# EAGLE board picoAvaR2 (EAGLE 6.2)
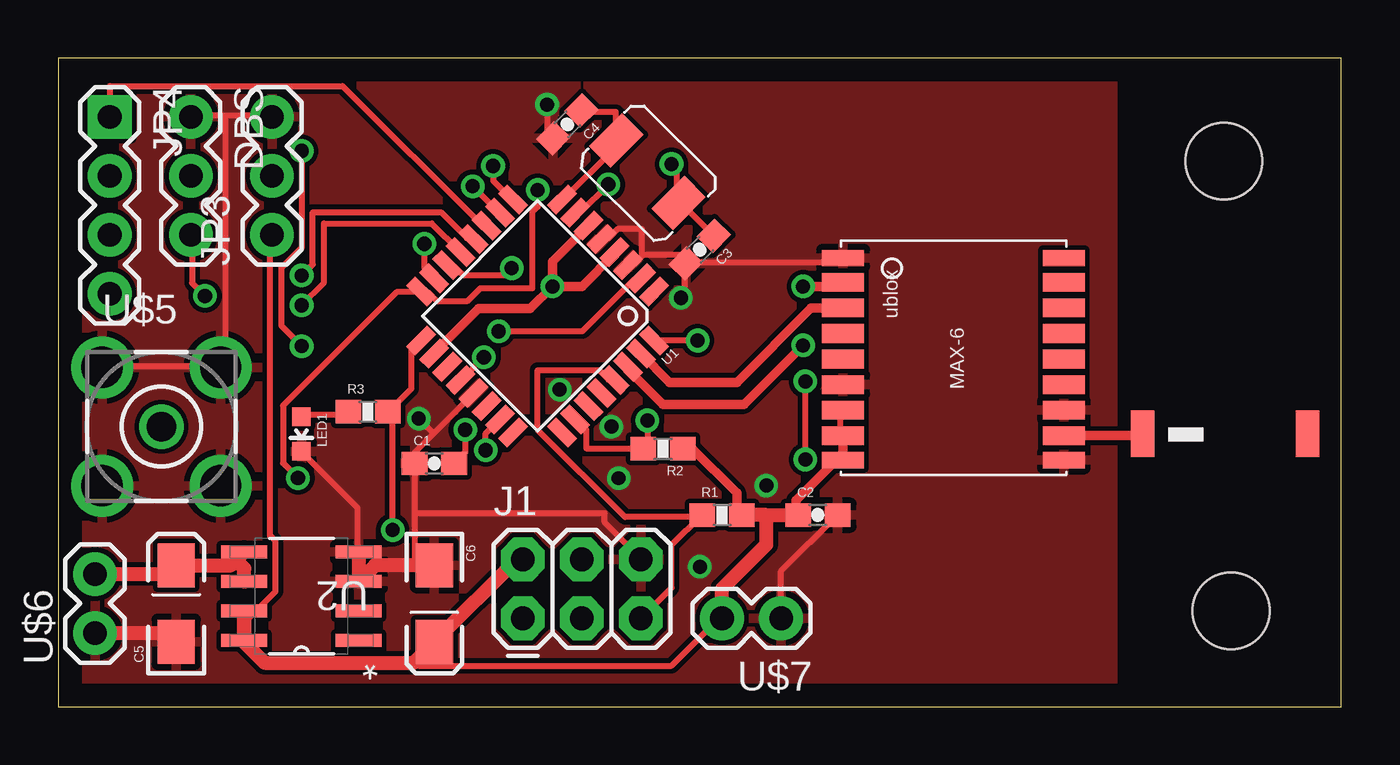
[diagram p0: board, top side]
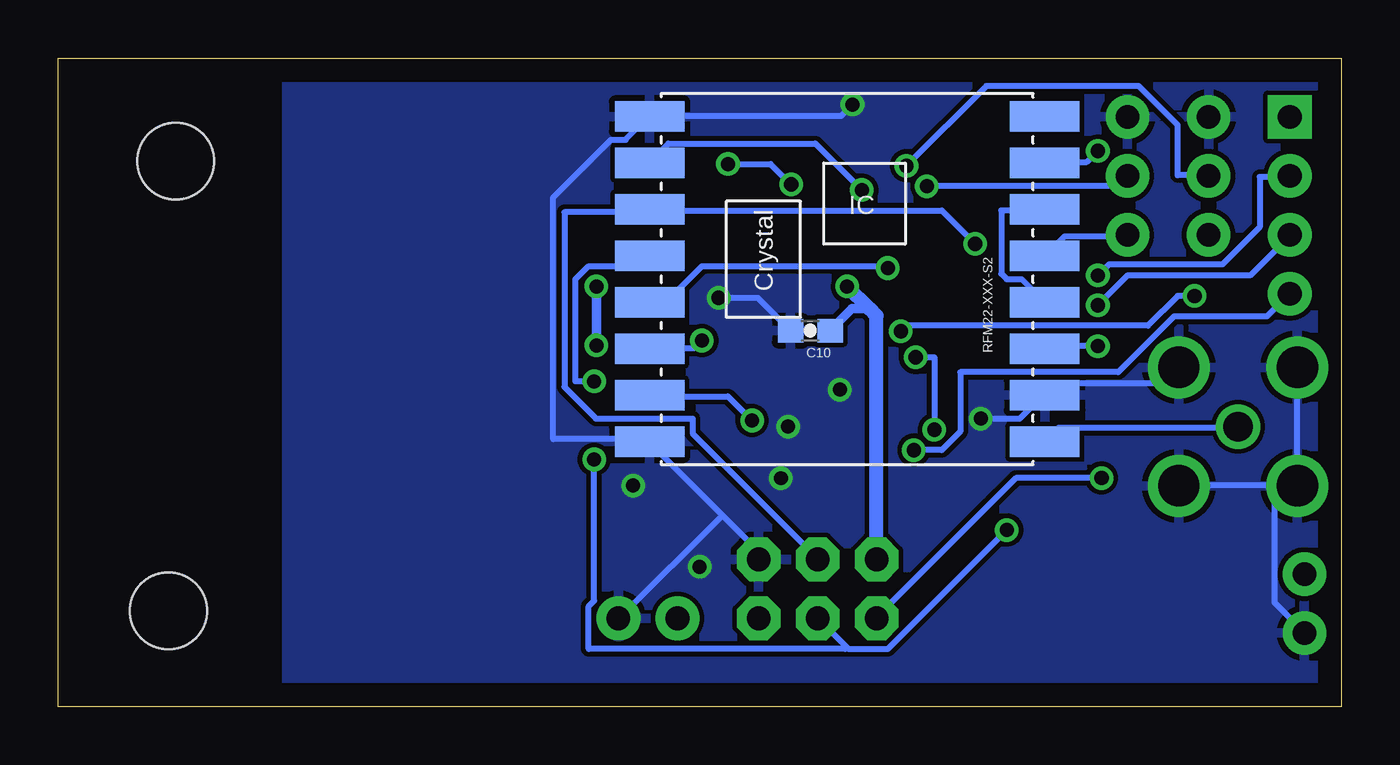
[diagram p1: board, bottom side, seen from below]

Size 55.23 x 27.93 mm. Coordinates in mm from the lower left corner, seen from the top.
Outline: 0,0 55.23,0 55.23,27.93 0,27.93 0,0
Copper layers (1*16): Top 0.035mm / dielectric 1.5mm / Bottom 0.035mm
Design rules: minimum track width 10mil, minimum drill 24mil, track to track 8mil, track to pad 8mil, pad to pad 8mil, via to via 8mil, smd to smd 8mil, copper to edge 40mil, drill to drill 8mil, minimum pad ring 10mil, minimum via ring 8mil, stop-mask expansion 4mil, vias tented up to drill 0mil, thermal gap 10mil
Net classes: 0 default: width 0.203 mm; 1 vcc: width 0.254 mm

## Footprints (pad centres in the part's own frame; a part is rotated, then mirrored left to right if it is on the bottom)
0603-CAP = smd 1.1 x 1: 1 -0.85,0; 2 0.85,0
EIA3216-KIT = smd 1.9 x 1.6: A 1.65,0; C -1.65,0
1X03 = drill 1.016 pad 1.88: 1 0,0; 2 2.54,0; 3 5.08,0
2X3 = drill 1.016 pad 1.88 octagon: 1 0,0; 2 0,2.54; 3 2.54,0; 4 2.54,2.54; 5 5.08,0; 6 5.08,2.54
STAND-OFF = hole 3.302: 0,0
1X04 = drill 1.016 pad 1.88 square: 1 0,0 | drill 1.016 pad 1.88: 2 2.54,0; 3 5.08,0; 4 7.62,0
LED-0603 = smd 0.8 x 0.8: A 0,-0.75; C 0,0.75
0603-RES = smd 1.1 x 1: 1 -0.85,0; 2 0.85,0
RFM22-XXX-S2 = smd 3 x 1.3: 1 -8.5,7; 2 -8.5,5; 3 -8.5,3; 4 -8.5,1; 5 -8.5,-1; 6 -8.5,-3; 7 -8.5,-5; 8 -8.5,-7; 9 8.5,-7; 10 8.5,-5; 11 8.5,-3; 12 8.5,-1; 13 8.5,1; 14 8.5,3; 15 8.5,5; 16 8.5,7
TQFP32-08 = smd 1.27 x 0.559: 1 -4.293,2.8; 2 -4.293,2; 3 -4.293,1.2; 4 -4.293,0.4; 5 -4.293,-0.4; 6 -4.293,-1.2; 7 -4.293,-2; 8 -4.293,-2.8; 17 4.293,-2.8; 18 4.293,-2; 19 4.293,-1.2; 20 4.293,-0.4; 21 4.293,0.4; 22 4.293,1.2; 23 4.293,2; 24 4.293,2.8 | smd 0.559 x 1.27: 9 -2.8,-4.293; 10 -2,-4.293; 11 -1.2,-4.293; 12 -0.4,-4.293; 13 0.4,-4.293; 14 1.2,-4.293; 15 2,-4.293; 16 2.8,-4.293; 25 2.8,4.293; 26 2,4.293; 27 1.2,4.293; 28 0.4,4.293; 29 -0.4,4.293; 30 -1.2,4.293; 31 -2,4.293; 32 -2.8,4.293
SOIC127P600X175-8N = smd 1.981 x 0.559: 1 -2.464,1.905; 2 -2.464,0.635; 3 -2.464,-0.635; 4 -2.464,-1.905; 5 2.464,-1.905; 6 2.464,-0.635; 7 2.464,0.635; 8 2.464,1.905
UBLOX_MAX-6 = smd 1.8 x 0.7: 1_GND 4.95,-4.4; 9_V_RESET 4.95,4.3; 10_GND -4.55,4.3; 18_RESERVED -4.55,-4.4 | smd 1.8 x 0.8: 2_TXD1 4.95,-3.35; 3_RXD1 4.95,-2.25; 4_TIMEPULSE 4.95,-1.15; 5_EXTINT0 4.95,-0.05; 6_V_BCKP 4.95,1.05; 7_VCC_IO 4.95,2.15; 8_VCC 4.95,3.25; 11_RF_IN -4.55,3.25; 12_GND -4.55,2.15; 13_ANTON -4.55,1.05; 14_VCC_RF -4.55,-0.05; 15_RESERVED -4.55,-1.15; 16_SDA2 -4.55,-2.25; 17_SCL2 -4.55,-3.35
ABRACON_ABM3_CRYSTAL = smd 1.3 x 2: P$1 -3.4,0.1; P$2 0.4,0.1
JTI_ANTENNA-1575AT43A40 = smd 1 x 2: FEED -3.81,-1.27; NC 3.29,-1.27
BUS-SMA = drill 1.27: 1 0,0 | drill 1.778: 2 -2.55,2.55; 3 2.55,2.55; 4 2.55,-2.55; 5 -2.55,-2.55
1X02 = drill 1.016 pad 1.88: 1 0,0; 2 2.54,0

## Placement (x,y rotation side)
C1  0.1uF  [0603-CAP]  16.19,10.48 0 top
C2  0.1uF  [0603-CAP]  32.7,8.26 0 top
C3  18pF  [0603-CAP]  27.62,19.68 225 top
C4  18pF  [0603-CAP]  21.91,25.08 225 top
C5  0.1uF  [EIA3216-KIT]  5.08,4.45 90 top
C6  4.7uF  [EIA3216-KIT]  16.19,4.45 270 top
C10  0.1uF  [0603-CAP]  22.86,16.19 180 bottom
DBS  [1X03]  5.71,25.4 270 top
J1  AVR_SPI_PRG_6PTH  [2X3]  20,3.81 0 top
JP1  STAND-OFF  [STAND-OFF]  50.48,4.13 0 top
JP2  STAND-OFF  [STAND-OFF]  50.16,23.49 0 top
JP3  [1X03]  9.21,20.32 90 top
JP4  [1X04]  2.22,25.4 270 top
LED1  [LED-0603]  10.48,11.75 180 top
R1  10k  [0603-RES]  28.57,8.26 0 top
R2  10k  [0603-RES]  26.04,11.11 180 top
R3  [0603-RES]  13.33,12.7 0 top
RFM22-XXX-S2  RFM22  [RFM22-XXX-S2]  21.27,18.41 180 bottom
U1  ATMEGA328  [TQFP32-08]  20.64,16.83 225 top
U2  TPS76633D  [SOIC127P600X175-8N]  10.48,4.76 180 top
U$1  UBLOX_MAX-6  [UBLOX_MAX-6]  38.73,14.92 180 top
U$2  ABRACON_ABM3_CRYSTAL  [ABRACON_ABM3_CRYSTAL]  26.35,21.91 315 top
U$3  JTI_ANTENNA-1575AT43A40  [JTI_ANTENNA-1575AT43A40]  50.48,13.02 0 top
U$5  BUS-SMA  [BUS-SMA]  4.45,12.07 0 top
U$6  [1X02]  1.59,3.17 90 top
U$7  [1X02]  31.12,3.81 180 top

## Library data of the parts
C1-C6 C10 DBS J1 JP1-JP4 LED1 R1-R3 RFM22-XXX-S2 U1 U$6 U$7 = SparkFun
U2 = ava; DESCRIPTION: ULTRALOW QUIESCENT CURRENT 250-mA LOW DROPOUT VOLTAGE REGULATORS; MPN: TPS76633D; OC_FARNELL: 8461422; OC_NEWARK: 77C1060; PACKAGE: SOIC-8; SUPPLIER: Texas Instruments
U$1-U$3 U$5 = ava

## Nets
AREF: C1.2 U1.20
GND [vcc]: C1.1 C2.2 C3.2 C4.2 C5.C C6.C C10.2 DBS.1 J1.6 JP3.3 LED1.C RFM22-XXX-S2.2 RFM22-XXX-S2.9 RFM22-XXX-S2.16 U1.3 U1.5 U1.21 U2.3 U2.4 U$1.1_GND U$1.6_V_BCKP U$1.10_GND U$1.12_GND U$5.2 U$5.3 U$5.4 U$5.5 U$6.1 U$7.1
MISO: J1.1 RFM22-XXX-S2.10 U1.16
MOSI: J1.4 RFM22-XXX-S2.11 U1.15
N$2: LED1.A R3.1
N$3: RFM22-XXX-S2.1 U$5.1
N$4: U$1.11_RF_IN U$3.FEED
N$5: RFM22-XXX-S2.3 RFM22-XXX-S2.7
N$6: RFM22-XXX-S2.4 RFM22-XXX-S2.6
N$9: C3.1 U1.7 U$2.P$2
N$10: C4.1 U1.8 U$2.P$1
NSS_RX: DBS.2 U1.9
NSS_TX: DBS.3 U1.2
PB0: JP4.2 U1.12
PB1: JP4.3 U1.13
PC0: JP4.4 U1.23
PD6: JP3.2 U1.10
PD7: JP4.1 U1.11
RESET: J1.5 R1.1 U1.29
RFM22_NIRQ: RFM22-XXX-S2.14 U1.32
RFM22_NSEL: RFM22-XXX-S2.13 U1.14
RFM22_SDN: R2.2 RFM22-XXX-S2.15 U1.26
SCK: J1.3 R3.2 RFM22-XXX-S2.12 U1.17
UBLOX_RXD: U1.31 U$1.3_RXD1
UBLOX_TXD: U1.30 U$1.2_TXD1
VBATT [vcc]: C5.A U2.5 U2.6 U$6.2
VCC: C2.1 C6.A C10.1 J1.2 JP3.1 R1.2 R2.1 RFM22-XXX-S2.5 U1.4 U1.6 U1.18 U2.7 U2.8 U$1.7_VCC_IO U$1.8_VCC U$1.9_V_RESET U$7.2

## Tracks (layer width: path | path; a pad name or v marks a point on that pad's centre or on a via)
AREF  (via drill 0.61)
  Top 0.254: v17.52,11.93 17.52,10.97 C1.2 | v18.32,15.05 17.36,14.09 U1.20
  Bottom 0.254: v17.52,11.93 17.52,15.05 v18.32,15.05
GND  (via drill 0.6, 0.61)
  Top 0.254: v26.8,17.61 26.96,17.77 26.96,19.05 C3.2 | 25.2,19.45 24.8,19.05 24.56,19.05 U1.3 | 25.2,19.45 26.88,19.45 26.88,19.13 C3.2 | U1.5 23.44,20.17 23.68,20.17 24.08,20.57 25.12,20.57 25.12,19.53 25.2,19.45 | 44,12.73 43.36,12.73 U$1.12_GND | 43.36,10.65 U$1.10_GND | C2.2 33.52,8.25 31.12,5.85 31.12,3.85 U$7.1 | C3.2 27.12,19.13 33.68,19.13 33.68,19.29 U$1.1_GND | 7.2,25.45 9.2,25.45 JP3.3 | 7.2,25.45 5.76,25.45 DBS.1 | 7.2,25.45 7.2,14.81 7.04,14.65 U$5.3 6.88,14.65 1.92,14.65 U$5.2 | LED1.C 10.48,10.97 12.88,8.57 12.88,6.97 U2.4 | 15.36,6.09 15.36,8.33 | 15.36,8.33 15.36,10.41 C1.1 15.36,10.57 15.36,10.97 16.16,11.77 | 16.16,11.77 17.84,13.45 U1.21 | v21.04,25.93 21.04,24.73 21.28,24.49 C4.2 | 15.36,8.33 23.52,8.33 23.52,7.93 25.04,6.41 J1.6 | 16.16,11.77 v15.52,12.41
  Top 0.61: U$6.1 4.7,3.17 C5.C | C6.C 15.36,6.09 13.64,6.09 U2.3 U2.4
  Bottom 0.254: v26.8,17.61 25.12,17.61 23.76,16.25 C10.2 | U$6.1 1.6,3.21 2.88,4.49 2.88,9.45 1.92,9.45 U$5.5 | U$5.4 6.96,9.53 2.96,9.53 U$5.5 | U$5.3 7.04,14.57 7.68,13.93 12.24,13.93 12.72,13.45 RFM22-XXX-S2.2 12.88,13.37 13.84,12.41 v15.52,12.41 | U$5.5 1.92,9.61 1.92,14.57 U$5.2 | v21.04,25.93 21.52,25.45 29.76,25.45 RFM22-XXX-S2.9 29.84,25.37 30.8,24.41 31.44,24.41 33.92,21.93 33.92,11.53 29.76,11.53 RFM22-XXX-S2.16 29.76,11.37 26.64,8.25 | 26.64,8.25 25.12,6.73 25.12,6.41 J1.6 | 26.64,8.25 31.04,3.85 U$7.1
  other vias: 27.62,6.03 24.13,9.84 23.81,12.07 30.48,9.52 21.59,13.65
  pour Top: -0.32,27.94 45.4,27.94 45.4,0.63 -0.32,0.63
  pour Bottom: -0.32,27.94 45.4,27.94 45.4,0.63 -0.32,0.63
MISO  (via drill 0.61)
  Top 0.254: v20.64,22.25 20.64,21.53 20.4,21.29 20.4,18.01 18.16,18.01 17.6,17.45 16.32,17.45 15.92,17.85 15.68,17.85 U1.16 15.52,17.85 14.56,17.85 9.68,12.97 9.68,10.49 v10.32,9.85
  Bottom 0.254: v20.64,22.25 22.64,24.25 28.96,24.25 29.76,23.45 RFM22-XXX-S2.10 | v10.32,9.85 14,9.85 20,3.85 J1.1
MOSI  (via drill 0.61)
  Top 0.254: v15.76,19.93 15.76,18.89 16.16,18.49 U1.15
  Bottom 0.254: v15.76,19.93 17.2,21.37 29.76,21.37 RFM22-XXX-S2.11 29.84,21.29 33.44,21.29 33.44,13.77 32.08,12.41 27.92,12.41 27.92,11.77 22.56,6.41 J1.4
N$2
  Top 0.254: LED1.A 10.48,12.57 12.48,12.57 12.48,12.65 R3.1
N$3
  Bottom 0.254: RFM22-XXX-S2.1 12.72,11.45 12.16,12.01 4.48,12.01 U$5.1
N$4
  Top 0.254: 43.28,11.61 U$1.11_RF_IN
  Top 0.406: U$1.11_RF_IN 43.3,11.69 46.61,11.69 U$3.FEED
N$5  (via drill 0.61)
  Top 0.254: v10.48,15.53 9.6,16.41 9.6,18.89 10.48,19.77 v10.48,23.93
  Bottom 0.254: v10.48,15.53 12.64,15.53 12.72,15.45 RFM22-XXX-S2.3 | v10.48,23.93 10.96,23.45 12.72,23.45 RFM22-XXX-S2.7
N$6
  Bottom 0.254: RFM22-XXX-S2.4 12.8,17.45 13.76,18.41 14.4,18.41 14.64,18.65 14.64,21.37 12.8,21.37 RFM22-XXX-S2.6
N$9  (via drill 0.61)
  Top 0.254: C3.1 28.16,20.33 26.72,21.77 U$2.P$2 26.64,21.85 26.64,23.13 v26.4,23.37 | v23.68,22.49 22.48,21.29 22.32,21.29 U1.7
  Bottom 0.254: v23.68,22.49 24.56,23.37 v26.4,23.37
N$10
  Top 0.254: C4.1 22.56,25.61 24,25.61 24,24.41 U$2.P$1 23.92,24.33 23.92,24.01 21.76,21.85 U1.8
NSS_RX  (via drill 0.61)
  Top 0.254: v18.72,23.29 18.72,22.65 19.52,21.85 U1.9
  Bottom 0.254: v18.72,23.29 15.28,26.73 8.72,26.73 7.04,25.05 7.04,22.89 5.76,22.89 DBS.2
NSS_TX  (via drill 0.61)
  Top 0.254: v18.96,16.17 22.56,16.17 24.8,18.41 25.04,18.41 U1.2 | v6.32,17.69 5.76,18.25 5.76,20.25 DBS.3
  Bottom 0.254: v18.96,16.17 18.72,16.41 8.32,16.41 7.04,17.69 v6.32,17.69
PB0  (via drill 0.61)
  Top 0.254: v10.48,18.57 10.96,19.05 10.96,21.29 16.48,21.29 17.6,20.17 17.84,20.17 U1.12
  Bottom 0.254: v10.48,18.57 10,19.05 5.12,19.05 3.52,20.65 3.52,22.81 2.24,22.81 JP4.2
PB1  (via drill 0.61)
  Top 0.254: v10.48,17.29 11.44,18.25 11.44,20.81 16.08,20.81 17.28,19.61 U1.13
  Bottom 0.254: v10.48,17.29 9.2,18.57 3.92,18.57 2.24,20.25 JP4.3
PC0  (via drill 0.61)
  Top 0.254: v18.4,11.05 18.4,11.77 18.96,12.33 U1.23
  Bottom 0.254: v18.4,11.05 17.2,11.05 16.4,11.85 16.4,14.41 9.6,14.41 7.2,16.81 3.2,16.81 2.24,17.77 JP4.4
PD6  (via drill 0.61)
  Top 0.254: v17.84,22.41 18.96,21.29 U1.10
  Bottom 0.254: v17.84,22.41 9.68,22.41 9.28,22.81 JP3.2
PD7
  Top 0.254: U1.11 18.4,20.73 18.24,20.73 12.24,26.73 2.24,26.73 2.24,25.45 JP4.1
RESET
  Top 0.254: J1.5 26.4,5.13 26.4,6.97 27.68,8.25 R1.1 27.44,8.17 24.4,8.17 20.64,11.93 20.64,14.49 23.28,14.49 23.68,14.09 23.92,14.09 U1.29
RFM22_NIRQ  (via drill 0.61)
  Top 0.254: v27.52,15.77 25.68,15.77 U1.32
  Bottom 0.254: v27.52,15.77 27.84,15.45 29.76,15.45 RFM22-XXX-S2.14
RFM22_NSEL  (via drill 0.61)
  Top 0.254: v19.52,18.89 19.52,18.57 17.44,18.57 17.04,18.97 16.8,18.97 U1.14
  Bottom 0.254: v19.52,18.89 19.6,18.97 27.52,18.97 29.04,17.45 29.76,17.45 RFM22-XXX-S2.13
RFM22_SDN  (via drill 0.61)
  Top 0.254: U1.26 22.32,12.33 22.72,11.93 22.72,11.13 25.12,11.13 R2.2 25.2,11.21 25.36,11.37 v25.36,12.33
  Bottom 0.254: v25.36,12.33 26.4,13.37 29.76,13.37 RFM22-XXX-S2.15
SCK  (via drill 0.61)
  Top 0.254: U1.17 15.6,15.77 15.2,15.37 15.2,13.69 14.24,12.73 R3.2 14.32,12.65 14.4,12.57 v14.4,7.61 | v32.16,10.65 v32.16,14.01
  Bottom 0.254: v14.4,7.61 19.52,2.49 21.2,2.49 21.28,2.57 | 21.28,2.57 22.48,3.77 J1.3 | v32.16,14.01 32.96,14.01 32.96,18.41 32.4,18.97 30.24,18.97 29.84,19.37 RFM22-XXX-S2.12 | v32.16,10.65 32.16,4.57 32.4,4.33 32.4,2.49 21.36,2.49 21.28,2.57
UBLOX_RXD
  Top 0.406: U$1.3_RXD1 32.41,17.17 29.21,13.97 26.32,13.97 U1.31
UBLOX_TXD  (via drill 0.6)
  Top 0.406: U1.30 24.52,14.53 26.03,13.02 29.53,13.02 v32.07,15.56 | v32.07,18.1 33.29,18.1 U$1.2_TXD1
  Bottom 0.406: v32.07,15.56 v32.07,18.1
VBATT
  Top 0.61: U$6.2 4.7,5.71 C5.A 7.44,6.09 7.66,6.31 | 7.66,6.31 U2.5 | U2.6 8.01,5.96 7.66,6.31
VCC  (via drill 0.6)
  Top 0.254: U$1.7_VCC_IO 33.68,12.57 33.68,11.85 U$1.8_VCC | U$7.2 28.32,3.69 26.4,1.77 15.52,1.77 15.3,1.91 | JP3.1 9.2,20.25 9.12,20.17 9.12,7.37 9.36,7.13 9.36,4.97 8.24,3.85 U2.7
  Top 0.406: v21.27,18.1 21.27,19.16 U1.6 | U1.4 23.96,19.51 22.54,18.1 v21.27,18.1 | U1.18 16.19,15.24 18.1,17.15 20.32,17.15 v21.27,18.1 | C2.1 31.75,8.36 31.75,8.89 33.47,10.61 U$1.9_V_RESET U$1.8_VCC | U$1.7_VCC_IO 33.58,12.77 33.65,12.7 | R2.1 27.3,11.11 29.21,9.21 29.21,8.47 R1.2
  Top 0.61: U2.8 U2.7 8.01,2.78 8.89,1.91 15.3,1.91 C6.A 19.75,6.35 J1.2 | U$7.2 28.57,5.08 30.48,6.98 30.48,8.26 | 30.48,8.26 R1.2 | 30.48,8.26 C2.1
  Bottom 0.254: RFM22-XXX-S2.5 12.72,19.45 11.92,20.25 9.28,20.25 JP3.1
  Bottom 0.406: 20.32,17.15 21.06,17.15 C10.1
  Bottom 0.61: J1.2 20,16.83 20.32,17.15 v21.27,18.1